# Altium PCB FEV-60_Motor_Driver.PcbDoc (part 1 of 2)
Units mil, origin at the board's own origin, x right, y up, seen from the top; angles counter-clockwise.
Board outline 4025 x 5275 mil, 2 copper layers (Top Layer, Bottom Layer); 167 components, 100 nets, 583 pads, 163 vias.
Unrouted connection lines stored in the file: 1.
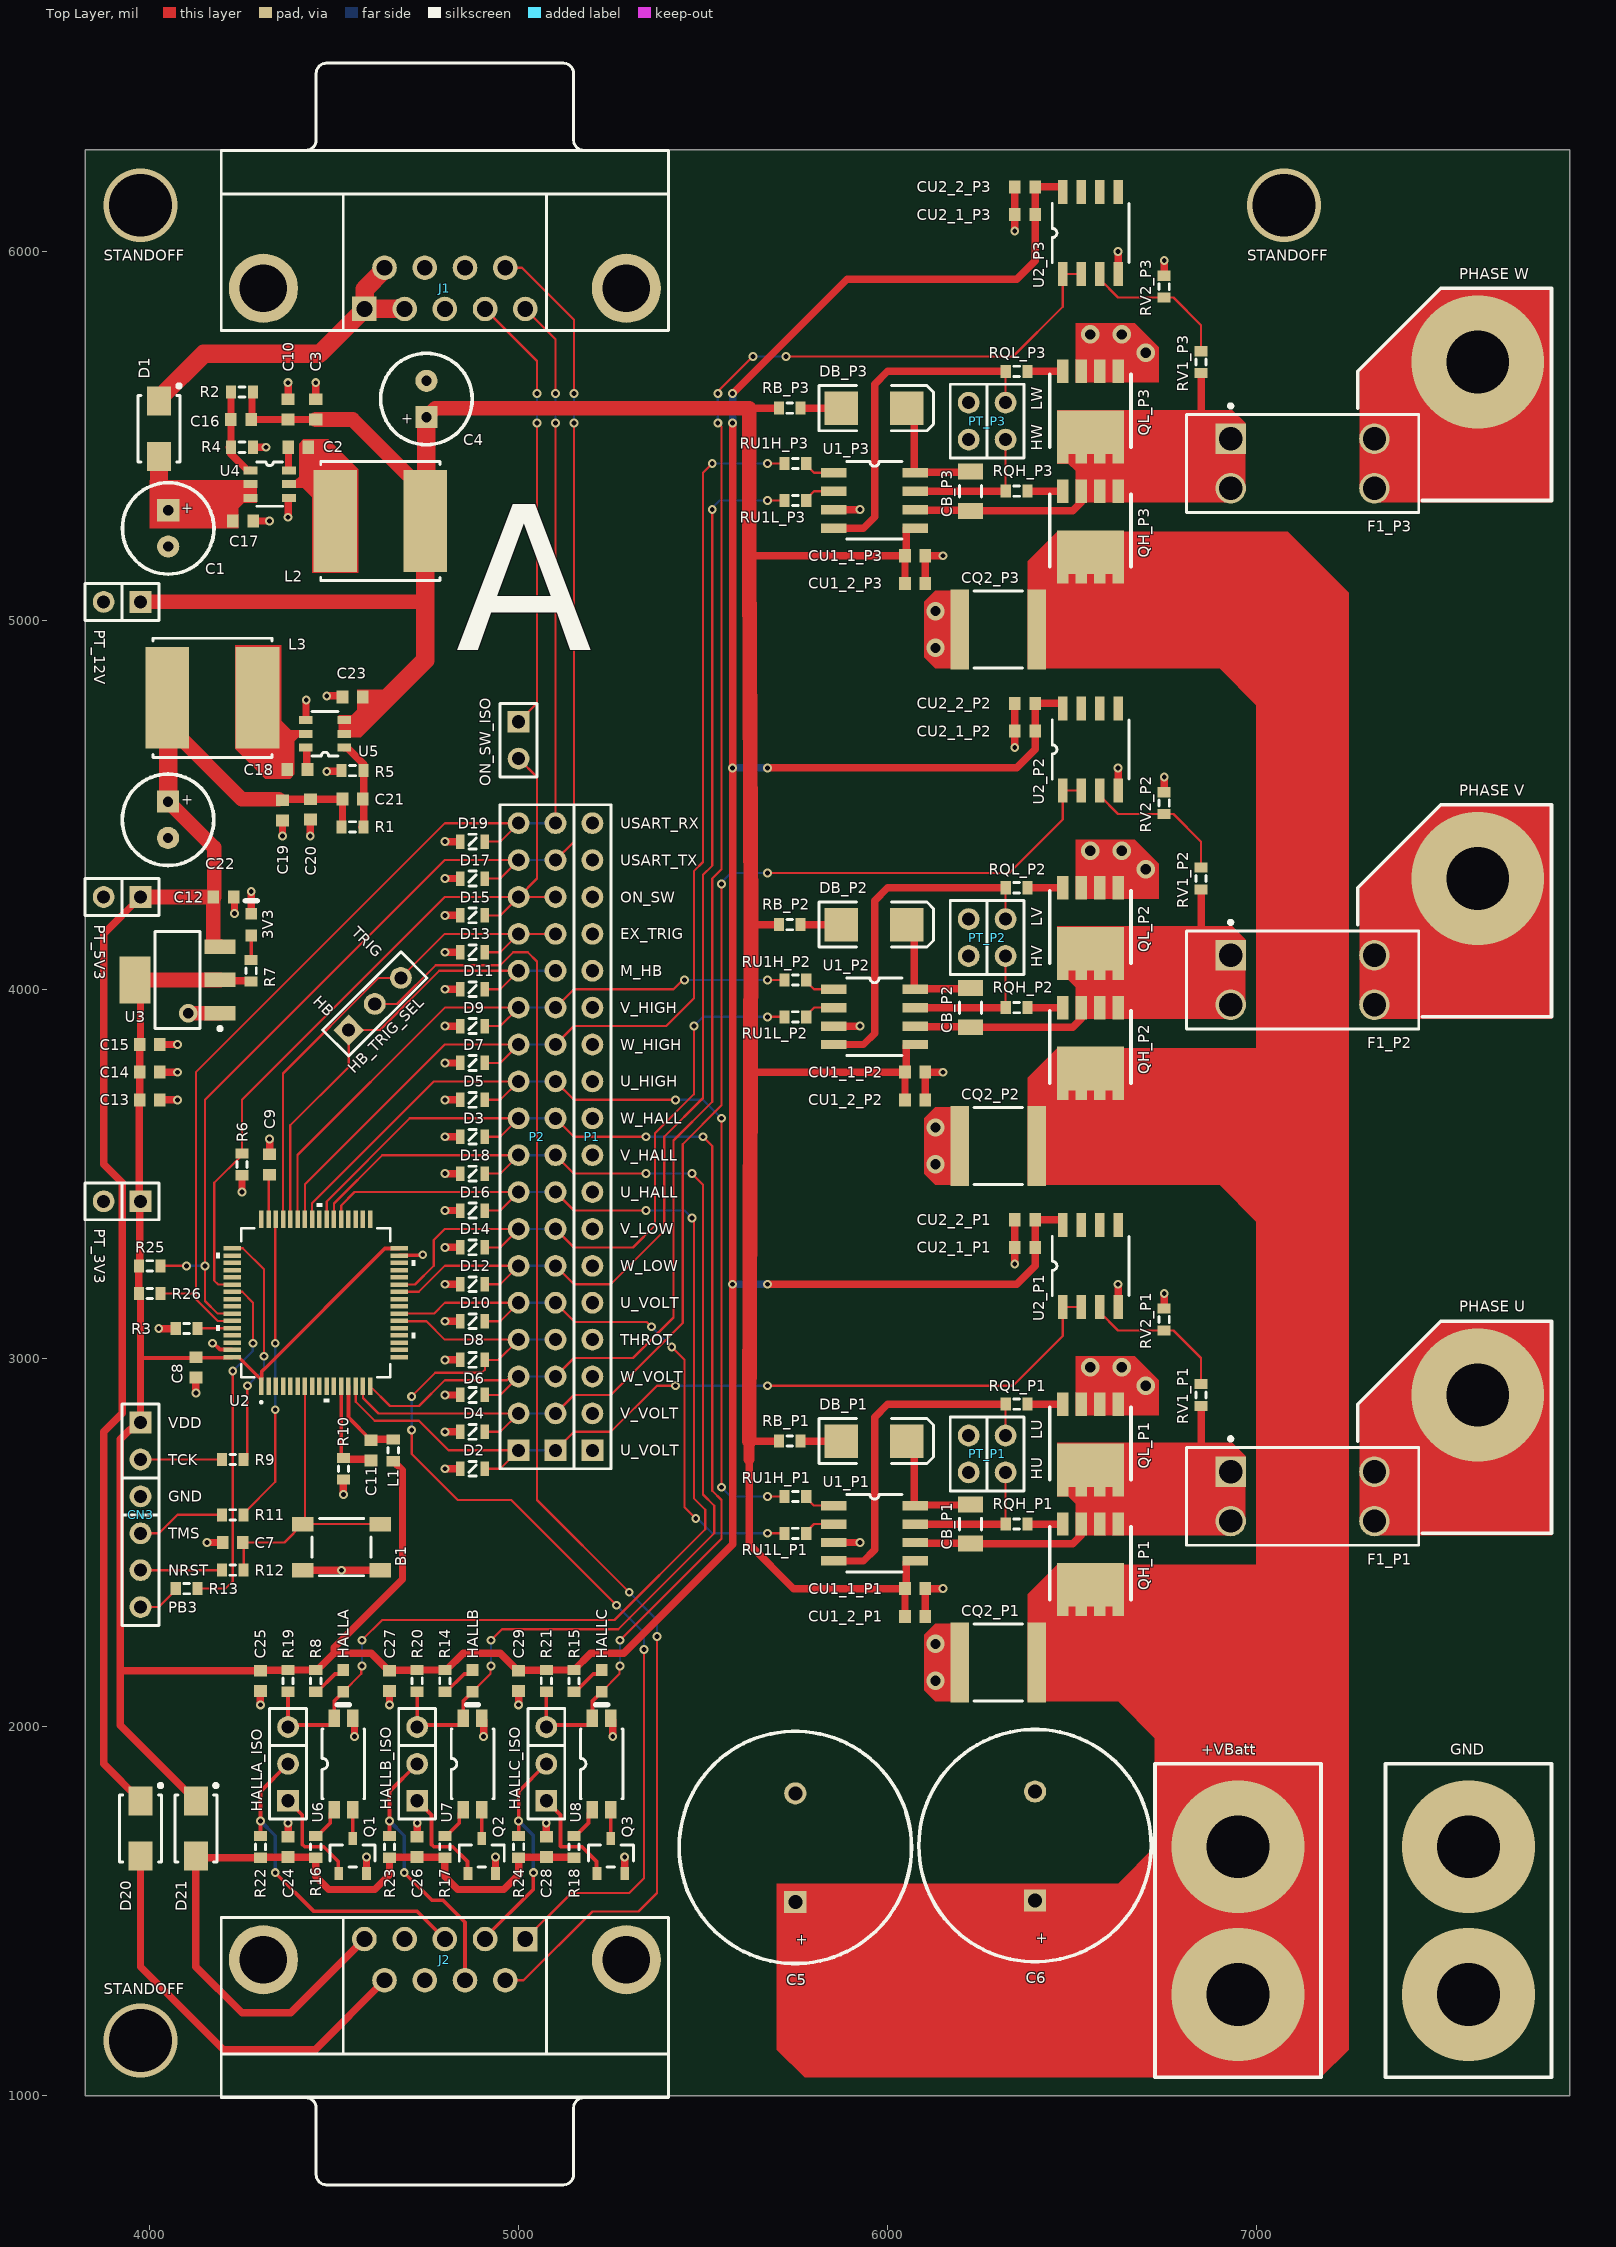
[diagram p0: Top Layer view]
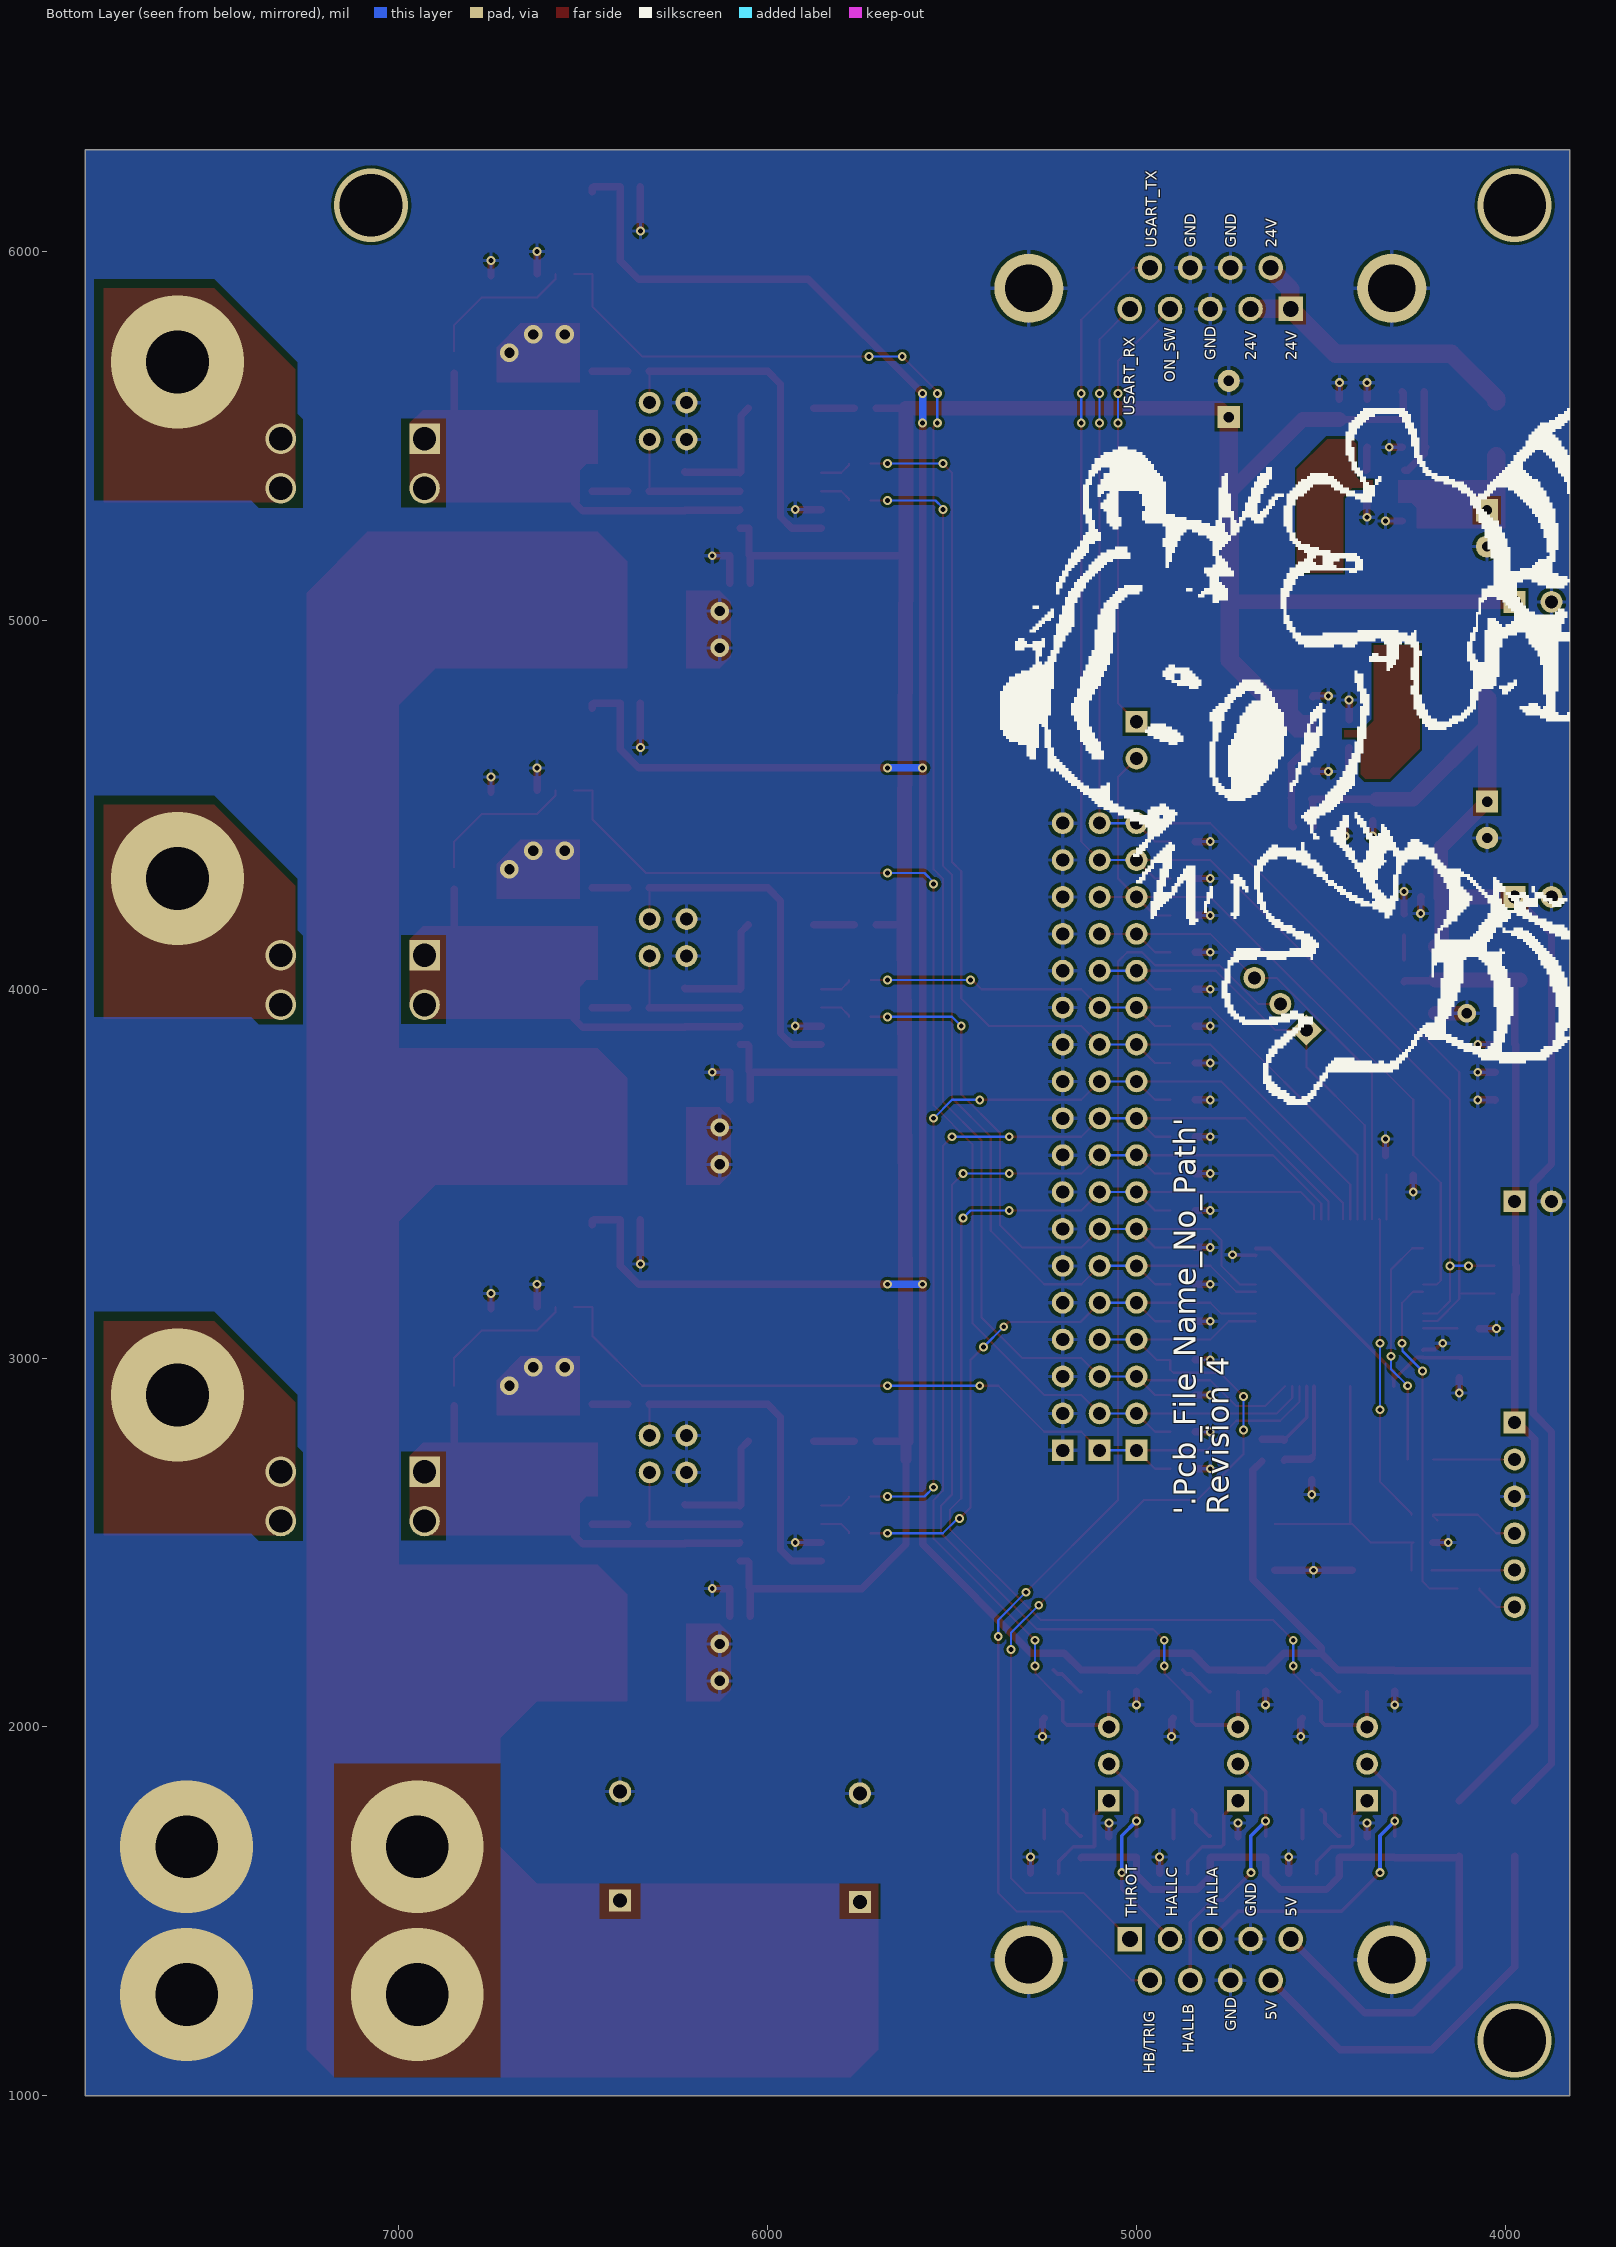
[diagram p1: Bottom Layer view, seen from below]

## Layer stack, top to bottom
Top Solder: solder mask 0.4, Solder Resist, Dk 3.5
Top Layer: signal copper 1.4
Dielectric 1: dielectric 12.6, FR-4, Dk 4.8
Bottom Layer: signal copper 1.4
Bottom Solder: solder mask 0.4, Solder Resist, Dk 3.5

## Board outline
3825,1000 7850,1000 7850,6275 3825,6275

## Design rules (kind name [scope] priority, off if disabled: settings)
Clearance Clearance_2 [All] p1: gap=8 ignorepadtopadclearanceinfootprint=FALSE
Clearance Clearance_1 [InNamedPolygon('Bottom Layer-GND')] p2: gap=10 ignorepadtopadclearanceinfootprint=FALSE except(0: Arc-Hole Track-Hole SMDPad-Hole THPad-Hole Via-Hole Fill-Hole Poly-Hole Region-Hole Text-Hole; 20: Via-Fill Via-Poly Via-Region)
Clearance [InNet('120V') vs InNet('GND')] p3: gap=6 ignorepadtopadclearanceinfootprint=FALSE except(200: Via-Poly)
ComponentClearance [All] p1: gap=6 collisioncheckmode=3 verticalgap=10 showdistances=FALSE
HoleSize [All] p1: absolutevalues=TRUE maxlimit=200 minlimit=1 maxpercent=80.000 minpercent=20.000
HoleToHoleClearance [All] p1: gap=6 allowstackedmicrovias=TRUE
MinimumSolderMaskSliver [All] p1: minsoldermaskwidth=6
PlaneClearance PlaneClearance_1 [All] p1: clearance=20
PolygonConnect PolygonConnect_3 [All vs IsNamedPolygon('Bottom Layer-GND')] p1: connectstyle=Relief reliefconductorwidth=10 reliefentries=4 polygonreliefangle="90 Angle" airgapwidth=10
PolygonConnect PolygonConnect_2 [All vs IsNamedPolygon('Bottom Layer-GND')] p2: connectstyle=Relief reliefconductorwidth=25 reliefentries=4 polygonreliefangle="90 Angle" airgapwidth=10
PolygonConnect [All] p3: connectstyle=Relief reliefconductorwidth=10 reliefentries=4 polygonreliefangle="90 Angle" airgapwidth=10
RoutingVias [All] p1: holewidth=13 width=24 viastyle="Through Hole" minholewidth=13 minwidth=24 maxholewidth=28 maxwidth=50
SilkToSilkClearance [All] p1: silktosilkclearance=3
SilkToSolderMaskClearance [IsPad] p1: minsilkscreentomaskgap=5 clearancetoexposedcopper=TRUE
SolderMaskExpansion [All] p1: expansion=4
Width [All] p1: maxlimit=100 minlimit=6 preferedwidth=6
23 further rules are at their usual default settings.

## Classes and differential pairs
net class HB_TRIG_SEL_Nets: EX_TRIG HB_TRIG M_HB
net class R26_Nets: 3V3 USART_RX
net class R25_Nets: 3V3 USART_TX
net class ON_SW_ISO_Nets: ON_SW ON_SWD
net class R6_Nets: GND ON_SW
net class PT_5V3_Nets: 5V3 GND
net class PT_12V_Nets: 12V GND
net class PT_3V3_Nets: 3V3 GND
net class C29_Nets: 3V3 GND
net class C28_Nets: 3V GND
net class C27_Nets: 3V3 GND
net class C26_Nets: 3V GND
net class C25_Nets: 3V3 GND
net class C24_Nets: 3V GND
net class U8_Nets: GND HALL3 NetQ3_3 NetR18_1
net class U7_Nets: GND HALL2 NetQ2_3 NetR17_1
net class HALLC_ISO_Nets: HALL3 HALLC ISOC
net class HALLB_ISO_Nets: HALL2 HALLB ISOB
net class HALLA_ISO_Nets: HALL1 HALLA ISOA
net class U6_Nets: GND HALL1 NetQ1_3 NetR16_1
net class U5_Nets: 12V FB2 GND NetC18_1 NetC18_2
net class RU1L_P3_Nets: LIN3 NetRU1L_P3_1
net class RU1L_P2_Nets: LIN2 NetRU1L_P2_1
net class RU1L_P1_Nets: LIN1 NetRU1L_P1_1
net class RU1H_P3_Nets: HIN3 NetRU1H_P3_1
net class RU1H_P2_Nets: HIN2 NetRU1H_P2_1
net class RU1H_P1_Nets: HIN1 NetRU1H_P1_1
net class R24_Nets: 3V HALLC
net class R23_Nets: 3V HALLB
net class R22_Nets: 3V HALLA
net class R21_Nets: 3V3 HALL3
net class R20_Nets: 3V3 HALL2
net class R19_Nets: 3V3 HALL1
net class R18_Nets: 3V NetR18_1
net class R17_Nets: 3V NetR17_1
net class R16_Nets: 3V NetR16_1
net class R15_Nets: 3V3 NetHALLC_1
net class R14_Nets: 3V3 NetHALLB_1
net class R8_Nets: 3V3 NetHALLA_1
net class R5_Nets: FB2 GND
net class R1_Nets: 5V3 FB2
net class Q3_Nets: GND ISOC NetQ3_3
net class Q2_Nets: GND ISOB NetQ2_3
net class Q1_Nets: GND ISOA NetQ1_3
net class L3_Nets: 5V3 NetC18_1
net class J2_Nets: 3V 5V GND HALLA HALLB HALLC HB_TRIG_SEL THROTTLE
net class HALLC_Nets: HALL3 NetHALLC_1
net class HALLB_Nets: HALL2 NetHALLB_1
net class HALLA_Nets: HALL1 NetHALLA_1
net class D21_Nets: 3V 3V3
net class D20_Nets: 5V 5V3
net class D19_Nets: GND USART_RX
net class D18_Nets: GND HALL2
net class D17_Nets: GND USART_TX
net class D16_Nets: GND HALL1
net class D15_Nets: GND ON_SW
net class D14_Nets: GND LIN2
net class D13_Nets: EX_TRIG GND
net class D12_Nets: GND LIN3
net class D11_Nets: GND M_HB
net class D10_Nets: GND LIN1
net class D9_Nets: GND HIN2
net class D8_Nets: GND THROTTLE
net class D7_Nets: GND HIN3
net class D6_Nets: GND V_SENSE3
net class D5_Nets: GND HIN1
net class D4_Nets: GND V_SENSE2
net class D3_Nets: GND HALL3
net class D2_Nets: GND V_SENSE1
net class C22_Nets: 5V3 GND
net class C21_Nets: 5V3 FB2
net class C20_Nets: 5V3 GND
net class C19_Nets: 5V3 GND
net class C18_Nets: NetC18_1 NetC18_2
net class C12_Nets: 5V3 GND
net class 3V3_Nets: GND Net3V3_1
net class PT_P3_Nets: GND HO_P3 LO_P3
net class PT_P2_Nets: GND HO_P2 LO_P2
net class PT_P1_Nets: GND HO_P1 LO_P1
net class R4_Nets: FB1 GND
net class R2_Nets: 12V FB1
net class L2_Nets: 12V NetC2_1
net class J1_Nets: 24V GND ON_SWD USART_RX USART_TX
net class C16_Nets: 12V FB1
net class C10_Nets: 12V GND
net class C2_Nets: NetC2_1 NetC2_2
net class P1_Nets: GND
net class U2_Nets: 3V3 A3V3 AGND BOOT0 EX_TRIG GND HALL1 HALL2 HALL3 HIN1 HIN2 HIN3 LIN1 LIN2 LIN3 M_HB NRST ON_SW PB3 PF6 TCK THROTTLE TMS USART_RX USART_TX V_SENSE1 V_SENSE2 V_SENSE3
net class D1_Nets: 24V NetC1_1
net class C4_Nets: 12V GND
net class C3_Nets: 12V GND
net class C17_Nets: GND NetC1_1
net class C1_Nets: GND NetC1_1
net class U4_Nets: FB1 GND NetC1_1 NetC2_1 NetC2_2
net class RV2_P3_Nets: GND NetRV1_P3_1
net class RV2_P2_Nets: GND NetRV1_P2_1
net class RV2_P1_Nets: GND NetRV1_P1_1
net class RV1_P3_Nets: NetCB_P3_1 NetRV1_P3_1
net class RV1_P2_Nets: NetCB_P2_1 NetRV1_P2_1
net class RV1_P1_Nets: NetCB_P1_1 NetRV1_P1_1
net class RQL_P3_Nets: LO_P3 NetQL_P3_2
net class RQL_P2_Nets: LO_P2 NetQL_P2_2
net class RQL_P1_Nets: LO_P1 NetQL_P1_2
net class RQH_P3_Nets: HO_P3 NetQH_P3_2
net class RQH_P2_Nets: HO_P2 NetQH_P2_2
net class RQH_P1_Nets: HO_P1 NetQH_P1_2
net class RB_P3_Nets: 12V NetDB_P3_1
net class RB_P2_Nets: 12V NetDB_P2_1
net class RB_P1_Nets: 12V NetDB_P1_1
net class QL_P3_Nets: GND NetQH_P3_3 NetQL_P3_2
net class QL_P2_Nets: GND NetQH_P2_3 NetQL_P2_2
net class QL_P1_Nets: GND NetQH_P1_3 NetQL_P1_2
net class QH_P3_Nets: 120V NetQH_P3_2 NetQH_P3_3
net class QH_P2_Nets: 120V NetQH_P2_2 NetQH_P2_3
net class QH_P1_Nets: 120V NetQH_P1_2 NetQH_P1_3
net class DB_P3_Nets: NetCB_P3_2 NetDB_P3_1
net class DB_P2_Nets: NetCB_P2_2 NetDB_P2_1
net class DB_P1_Nets: NetCB_P1_2 NetDB_P1_1
net class CU2_2_P3_Nets: 3V3 GND
net class CU2_1_P3_Nets: 3V3 GND
net class CU2_1_P2_Nets: 3V3 GND
net class CU2_1_P1_Nets: 3V3 GND
net class CU1_2_P3_Nets: 12V GND
net class CU1_2_P2_Nets: 12V GND
net class CU1_2_P1_Nets: 12V GND
net class CU1_1_P2_Nets: 12V GND
net class CU1_1_P1_Nets: 12V GND
net class CQ2_P3_Nets: 120V GND
net class CQ2_P2_Nets: 120V GND
net class C5_Nets: 120V GND
net class C6_Nets: 120V GND
net class CB_P3_Nets: NetCB_P3_1 NetCB_P3_2
net class CB_P2_Nets: NetCB_P2_1 NetCB_P2_2
net class CB_P1_Nets: NetCB_P1_1 NetCB_P1_2
net class V_SENSE[3..1]: V_SENSE1 V_SENSE2 V_SENSE3
net class U3_Nets: 3V3 5V3 GND
net class U2_P3_Nets: 3V3 GND NetRV1_P3_1 V_SENSE3
net class U2_P2_Nets: 3V3 GND NetRV1_P2_1 V_SENSE2
net class U2_P1_Nets: 3V3 GND NetRV1_P1_1 V_SENSE1
net class R13_Nets: NetCN3_6 PB3
net class R12_Nets: NetCN3_5 NRST
net class R11_Nets: NetCN3_4 TMS
net class R10_Nets: AGND GND
net class R9_Nets: NetCN3_2 TCK
net class R7_Nets: 3V3 Net3V3_1
net class R3_Nets: BOOT0 GND
net class L1_Nets: 3V3 A3V3
net class F1_P3_Nets: NetCB_P3_1 NetF1_P3_3
net class F1_P2_Nets: NetCB_P2_1 NetF1_P2_3
net class F1_P1_Nets: NetCB_P1_1 NetF1_P1_3
net class CN3_Nets: 3V3 GND NetCN3_2 NetCN3_4 NetCN3_5 NetCN3_6
net class C15_Nets: 3V3 GND
net class C14_Nets: 3V3 GND
net class C13_Nets: 3V3 GND
net class C23_Nets: 12V GND
net class C11_Nets: A3V3 AGND
net class C9_Nets: GND PF6
net class C8_Nets: 3V3 GND
net class C7_Nets: GND NRST
net class CU2_2_P2_Nets: 3V3 GND
net class CU2_2_P1_Nets: 3V3 GND
net class B1_Nets: GND NRST
component class U_FEV-60_Motor_Driver_Mcu: 3V3 B1 C1 C2 C3 C4 C5 C6 C7 C8 C9 C10 C11 C12 C13 C14 C15 C16 C17 C18 C19 C20 C21 C22 C23 C24 C25 C26 C27 C28 C29 CN3 D1 D2 D3 D4 D5 D6 D7 D8 D9 D10 D11 D12 D13 D14 D15 D16 D17 D18 D19 D20 D21 HALLA HALLA_ISO HALLB HALLB_ISO HALLC HALLC_ISO HB_TRIG_SEL J1 J2 L1 L2 L3 ON_SW_ISO P1 P2 PT_3V3 PT_5V3 PT_12V Q1 Q2 Q3 R1 R2 R3 R4 R5 R6 R7 R8 R9 R10 R11 R12 R13 R14 R15 R16 R17 R18 R19 R20 R21 R22 R23 R24 R25 R26 U2 U3 U4 U5 U6 U7 U8
net class LIN[3..1]: LIN1 LIN2 LIN3
net class HIN[3..1]: HIN1 HIN2 HIN3
net class P2_Nets: EX_TRIG HALL1 HALL2 HALL3 HIN1 HIN2 HIN3 LIN1 LIN2 LIN3 M_HB NetCN2_1 NetCN2_2 NetCN2_6 NetCN2_7 NetCN2_8 NetCN2_9 NetCN2_10 NetCN2_12 NetCN2_14 NetCN2_15 NetCN2_17 NetCN2_18 NetCN2_22 NetCN2_24 NetCN2_25 NetCN2_26 NetCN2_27 NetCN2_29 NetCN2_31 NetCN2_32 NetCN2_34 NetCN2_36 NetCN2_38 ON_SW THROTTLE USART_RX USART_TX V_SENSE1 V_SENSE2 V_SENSE3
net class U1_P3_Nets: 12V GND HO_P3 LO_P3 NetCB_P3_1 NetCB_P3_2 NetRU1H_P3_1 NetRU1L_P3_1
net class U1_P2_Nets: 12V GND HO_P2 LO_P2 NetCB_P2_1 NetCB_P2_2 NetRU1H_P2_1 NetRU1L_P2_1
net class U1_P1_Nets: 12V GND HO_P1 LO_P1 NetCB_P1_1 NetCB_P1_2 NetRU1H_P1_1 NetRU1L_P1_1
net class CQ2_P1_Nets: 120V GND
net class CU1_1_P3_Nets: 12V GND
component class P3: CB_P3 CQ2_P3 CU1_1_P3 CU1_2_P3 CU2_1_P3 CU2_2_P3 DB_P3 F1_P3 PT_P3 QH_P3 QL_P3 RB_P3 RQH_P3 RQL_P3 RU1H_P3 RU1L_P3 RV1_P3 RV2_P3 U1_P3 U2_P3
component class P2: CB_P2 CQ2_P2 CU1_1_P2 CU1_2_P2 CU2_1_P2 CU2_2_P2 DB_P2 F1_P2 PT_P2 QH_P2 QL_P2 RB_P2 RQH_P2 RQL_P2 RU1H_P2 RU1L_P2 RV1_P2 RV2_P2 U1_P2 U2_P2
component class P1: CB_P1 CQ2_P1 CU1_1_P1 CU1_2_P1 CU2_1_P1 CU2_2_P1 DB_P1 F1_P1 PT_P1 QH_P1 QL_P1 RB_P1 RQH_P1 RQL_P1 RU1H_P1 RU1L_P1 RV1_P1 RV2_P1 U1_P1 U2_P1
channel class FEV-60_Motor_Driver_Phase1: PHASE1 PHASE2 PHASE3

## Components (designator, comment, footprint, x,y, rotation, side; value= is the part's Value field where it differs from the comment)
3V3 "LED-RED-AK-2" AVAG-HSMX-C190_V 4275,4175 r90 top
B1 "Button" "Button - duplicate" 4625,2425 r180 top
C1 "UVY1V101MED1TD" UVY1V101MED1TD 4050,5280 r270 top value=100uF
C2 "Cap Semi" 1608[0603] 4402.56,5469.21 r180 top value=100nF
C3 "Cap Semi" 1608[0603] 4450,5571.77 r270 top value=10uF
C4 "UVY1V101MED1TD" UVY1V101MED1TD 4750,5569.21 r90 top value=100uF
C5 "UCS2D151MHD1TN" UCS2D151MHD1TN 5920,1675 r90 top value=100pF
C6 "UCS2D151MHD1TN" UCS2D151MHD1TN 6570,1680 r90 top value=100pF
C7 "Cap Semi" 1608[0603] 4225,2500 r0 top value=100nF
C8 "Cap Semi" 1608[0603] 4125,2975 r90 top value=22uF
C9 "Cap Semi" 1608[0603] 4325,3525 r270 top value=2.2uF
C10 "Cap Semi" 1608[0603] 4375,5571.77 r270 top value=10uF
C11 "Cap Semi" 1608[0603] 4600,2750 r90 top value=10uF
C12 "Cap Semi" 1608[0603] 4200,4250 r180 top value=10uF
C13 "Cap Semi" 1608[0603] 4000,3700 r180 top value=10uF
C14 "Cap Semi" 1608[0603] 4000,3775 r180 top value=10uF
C15 "Cap Semi" 1608[0603] 4000,3850 r180 top value=10uF
C16 "Cap Semi" 1608[0603] 4247.44,5544.21 r0 top value=12pF
C17 "Cap Semi" 1608[0603] 4252.56,5269.21 r180 top value=10uF
C18 "Cap Semi" 1608[0603] 4400,4595 r0 top value=100nF
C19 "Cap Semi" 1608[0603] 4360,4485 r90 top value=10uF
C20 "Cap Semi" 1608[0603] 4436.02,4487.44 r90 top value=10uF
C21 "Cap Semi" 1608[0603] 4550,4515 r180 top value=47pF
C22 "UVY1V101MED1TD" UVY1V101MED1TD 4049.61,4490 r270 top value=100uF
C23 "Cap Semi" 1608[0603] 4550,4792.32 r0 top value=10uF
C24 "Cap Semi" 1608[0603] 4375,1675 r270 top value=10uF
C25 "Cap Semi" 1608[0603] 4300,2125 r90 top value=10uF
C26 "Cap Semi" 1608[0603] 4725,1675 r270 top value=10uF
C27 "Cap Semi" 1608[0603] 4650,2125 r90 top value=10uF
C28 "Cap Semi" 1608[0603] 5075,1675 r270 top value=10uF
C29 "Cap Semi" 1608[0603] 5000,2125 r90 top value=10uF
CB_P1 "Cap Semi" C1206 6225,2550 r90 top value=10uF (schematic designator CB)
CB_P2 "Cap Semi" C1206 6225,3950 r90 top value=10uF (schematic designator CB)
CB_P3 "Cap Semi" C1206 6225,5350 r90 top value=10uF (schematic designator CB)
CN3 "Header 6X1" HDR1X6 3975,2825 r270 top
CQ2_P1 "1uF" TDK-C5750-2_M 6300,2175 r180 top (schematic designator CQ2)
CQ2_P2 "1uF" TDK-C5750-2_M 6300,3575 r180 top (schematic designator CQ2)
CQ2_P3 "1uF" TDK-C5750-2_M 6300,4975 r180 top (schematic designator CQ2)
CU1_1_P1 "Cap Semi" 1608[0603] 6075,2375 r0 top value=10uF (schematic designator CU1_1)
CU1_1_P2 "Cap Semi" 1608[0603] 6075,3775 r0 top value=10uF (schematic designator CU1_1)
CU1_1_P3 "Cap Semi" 1608[0603] 6075,5175 r0 top value=10uF (schematic designator CU1_1)
CU1_2_P1 "Cap Semi" 1608[0603] 6075,2300 r0 top value=10uF (schematic designator CU1_2)
CU1_2_P2 "Cap Semi" 1608[0603] 6075,3700 r0 top value=10uF (schematic designator CU1_2)
CU1_2_P3 "Cap Semi" 1608[0603] 6075,5100 r0 top value=10uF (schematic designator CU1_2)
CU2_1_P1 "Cap Semi" 1608[0603] 6372.44,3300 r180 top value=10uF (schematic designator CU2_1)
CU2_1_P2 "Cap Semi" 1608[0603] 6372.44,4700 r180 top value=10uF (schematic designator CU2_1)
CU2_1_P3 "Cap Semi" 1608[0603] 6372.44,6100 r180 top value=10uF (schematic designator CU2_1)
CU2_2_P1 "Cap Semi" 1608[0603] 6372.44,3375 r180 top value=10uF (schematic designator CU2_2)
CU2_2_P2 "Cap Semi" 1608[0603] 6372.44,4775 r180 top value=10uF (schematic designator CU2_2)
CU2_2_P3 "Cap Semi" 1608[0603] 6372.44,6175 r180 top value=10uF (schematic designator CU2_2)
D1 "STPS2L30A" STPS2L30A 4025,5519.21 r270 top
D2 "SP1103C-01UTG" SP1103C-01UTG 4875,2700 r180 top
D3 "SP1103C-01UTG" SP1103C-01UTG 4875,3600 r180 top
D4 "SP1103C-01UTG" SP1103C-01UTG 4875,2800 r180 top
D5 "SP1103C-01UTG" SP1103C-01UTG 4875,3700 r180 top
D6 "SP1103C-01UTG" SP1103C-01UTG 4875,2900 r180 top
D7 "SP1103C-01UTG" SP1103C-01UTG 4875,3800 r180 top
D8 "SP1103C-01UTG" SP1103C-01UTG 4875,2995 r180 top
D9 "SP1103C-01UTG" SP1103C-01UTG 4875,3900 r180 top
D10 "SP1103C-01UTG" SP1103C-01UTG 4875,3100 r180 top
D11 "SP1103C-01UTG" SP1103C-01UTG 4875,4000 r180 top
D12 "SP1103C-01UTG" SP1103C-01UTG 4875,3200 r180 top
D13 "SP1103C-01UTG" SP1103C-01UTG 4875,4100 r180 top
D14 "SP1103C-01UTG" SP1103C-01UTG 4875,3300 r180 top
D15 "SP1103C-01UTG" SP1103C-01UTG 4875,4200 r180 top
D16 "SP1103C-01UTG" SP1103C-01UTG 4875,3400 r180 top
D17 "SP1103C-01UTG" SP1103C-01UTG 4875,4300 r180 top
D18 "SP1103C-01UTG" SP1103C-01UTG 4875,3500 r180 top
D19 "SP1103C-01UTG" SP1103C-01UTG 4875,4400 r180 top
D20 "STPS2L30A" STPS2L30A 3975,1725 r270 top
D21 "STPS2L30A" STPS2L30A 4125,1725 r270 top
DB_P1 "STPS2200U" SMB 5963.58,2775 r0 top (schematic designator DB)
DB_P2 "STPS2200U" SMB 5963.58,4175 r0 top (schematic designator DB)
DB_P3 "STPS2200U" SMB 5963.58,5575 r0 top (schematic designator DB)
F1_P1 "3568" KSTN-3568_V 7125,2625 r0 top (schematic designator F1)
F1_P2 "3568" KSTN-3568_V 7125,4025 r0 top (schematic designator F1)
F1_P3 "3568" KSTN-3568_V 7125,5425 r0 top (schematic designator F1)
HALLA "LED-RED-AK-2" AVAG-HSMX-C190_V 4525,2125 r270 top
HALLA_ISO "Header 3" HDR1X3 4375,1800 r90 top
HALLB "LED-RED-AK-2" AVAG-HSMX-C190_V 4875,2125 r270 top
HALLB_ISO "Header 3" HDR1X3 4725,1800 r90 top
HALLC "LED-RED-AK-2" AVAG-HSMX-C190_V 5225,2125 r270 top
HALLC_ISO "Header 3" HDR1X3 5075,1800 r90 top
HB_TRIG_SEL "Header 3" HDR1X3 4539.29,3889.29 r45 top
J1 "D Connector 9" DSUB1.385-2H9 4800,6274.02 r0 top locked
J2 "D Connector 9" DSUB1.385-2H9 4800,995.08 r180 top locked
L1 "Ferrite" J1-0603 4660,2750 r90 top
L2 "Inductor" 74404084100 4625,5269.21 r0 top value=10uH
L3 "Inductor" 74404084100 4170,4790 r180 top value=10uH
ON_SW_ISO "Header 2" HDR1X2 5000,4725 r270 top
P1 "Header 18" HDR1X18 5200,2750 r90 top locked
P2 "Header 18X2" HDR2X18 5100,2750 r90 top locked
PT_3V3 "Header 2" HDR1X2 3975,3425 r180 top
PT_5V3 "Header 2" HDR1X2 3975,4250 r180 top
PT_12V "Header 2" HDR1X2 3975,5050 r180 top
PT_P1 "Header 2X2" HDR2X2 6220,2790 r270 top (schematic designator PT)
PT_P2 "Header 2X2" HDR2X2 6220,4190 r270 top (schematic designator PT)
PT_P3 "Header 2X2" HDR2X2 6220,5590 r270 top (schematic designator PT)
Q1 "RK7002BMT116" SOT95P240X120-3N 4550,1650 r90 top
Q2 "RK7002BMT116" SOT95P240X120-3N 4900,1650 r90 top
Q3 "RK7002BMT116" SOT95P240X120-3N 5250,1650 r90 top
QH_P1 "TPH2900ENH" TPH2900ENH 6625,2555 r270 top (schematic designator QH)
QH_P2 "TPH2900ENH" TPH2900ENH 6625,3955 r270 top (schematic designator QH)
QH_P3 "TPH2900ENH" TPH2900ENH 6625,5355 r270 top (schematic designator QH)
QL_P1 "TPH2900ENH" TPH2900ENH 6625,2880 r270 top (schematic designator QL)
QL_P2 "TPH2900ENH" TPH2900ENH 6625,4280 r270 top (schematic designator QL)
QL_P3 "TPH2900ENH" TPH2900ENH 6625,5680 r270 top (schematic designator QL)
R1 "Res3" J1-0603 4549.61,4440 r0 top value=172K
R2 "Res3" J1-0603 4250,5619.21 r180 top value=422K
R3 "Res3" J1-0603 4100,3080 r0 top value=10K
R4 "Res3" J1-0603 4250,5469.21 r0 top value=30.1K
R5 "Res3" J1-0603 4549.61,4592.32 r180 top value=30.1K
R6 "Res3" J1-0603 4250,3525 r270 top value=10K
R7 "Res3" J1-0603 4275,4050 r270 top value=1K
R8 "Res3" J1-0603 4450,2125 r90 top value=1K
R9 "Res3" J1-0603 4225,2725 r0 top value=22
R10 "Res3" J1-0603 4525,2700 r90 top value=0
R11 "Res3" J1-0603 4225,2575 r0 top value=22
R12 "Res3" J1-0603 4225,2425 r0 top value=22
R13 "Res3" J1-0603 4100,2375 r0 top value=22
R14 "Res3" J1-0603 4800,2125 r90 top value=1K
R15 "Res3" J1-0603 5150,2125 r90 top value=1K
R16 "Res3" J1-0603 4450,1675 r270 top value=calc
R17 "Res3" J1-0603 4800,1675 r270 top value=calc
R18 "Res3" J1-0603 5150,1675 r270 top value=calc
R19 "Res3" J1-0603 4375,2125 r90 top value=10K
R20 "Res3" J1-0603 4725,2125 r90 top value=10K
R21 "Res3" J1-0603 5075,2125 r90 top value=10K
R22 "Res3" J1-0603 4300,1675 r270 top value=10K
R23 "Res3" J1-0603 4650,1675 r270 top value=10K
R24 "Res3" J1-0603 5000,1675 r270 top value=10K
R25 "Res3" J1-0603 4000,3250 r180 top value=10K
R26 "Res3" J1-0603 4000,3175 r180 top value=10K
RB_P1 "Res3" J1-0603 5735,2775 r0 top value=5 (schematic designator RB)
RB_P2 "Res3" J1-0603 5735,4175 r0 top value=5 (schematic designator RB)
RB_P3 "Res3" J1-0603 5735,5575 r0 top value=5 (schematic designator RB)
RQH_P1 "Res3" J1-0603 6350,2550 r0 top value=5 (schematic designator RQH)
RQH_P2 "Res3" J1-0603 6350,3950 r0 top value=5 (schematic designator RQH)
RQH_P3 "Res3" J1-0603 6350,5350 r0 top value=5 (schematic designator RQH)
RQL_P1 "Res3" J1-0603 6350,2875 r0 top value=5 (schematic designator RQL)
RQL_P2 "Res3" J1-0603 6350,4275 r0 top value=5 (schematic designator RQL)
RQL_P3 "Res3" J1-0603 6350,5675 r0 top value=5 (schematic designator RQL)
RU1H_P1 "Res3" J1-0603 5750,2625 r180 top value=1K (schematic designator RU1H)
RU1H_P2 "Res3" J1-0603 5750,4025 r180 top value=1K (schematic designator RU1H)
RU1H_P3 "Res3" J1-0603 5750,5425 r180 top value=1K (schematic designator RU1H)
RU1L_P1 "Res3" J1-0603 5750,2525 r180 top value=1K (schematic designator RU1L)
RU1L_P2 "Res3" J1-0603 5750,3925 r180 top value=1K (schematic designator RU1L)
RU1L_P3 "Res3" J1-0603 5750,5325 r180 top value=1K (schematic designator RU1L)
RV1_P1 "Res3" J1-0603 6850,2900 r270 top value=1Meg (schematic designator RV1)
RV1_P2 "Res3" J1-0603 6850,4300 r270 top value=1Meg (schematic designator RV1)
RV1_P3 "Res3" J1-0603 6850,5700 r270 top value=1Meg (schematic designator RV1)
RV2_P1 "Res3" J1-0603 6750,3104.53 r270 top value=22K (schematic designator RV2)
RV2_P2 "Res3" J1-0603 6750,4504.53 r270 top value=22K (schematic designator RV2)
RV2_P3 "Res3" J1-0603 6750,5904.53 r270 top value=22K (schematic designator RV2)
U1_P1 "FAN7191-F085" FAN7191-F085 5854.53,2600 r0 top (schematic designator U1)
U1_P2 "FAN7191-F085" FAN7191-F085 5854.53,4000 r0 top (schematic designator U1)
U1_P3 "FAN7191-F085" FAN7191-F085 5854.53,5400 r0 top (schematic designator U1)
U2 "MCU_LQFP64" "STM32F030R8 - duplicate" 4450,3150 r90 top locked
U2_P1 "TLV272IDR" D0008A_M 6550,3250 r90 top (schematic designator U2)
U2_P2 "TLV272IDR" D0008A_M 6550,4650 r90 top (schematic designator U2)
U2_P3 "TLV272IDR" D0008A_M 6550,6050 r90 top (schematic designator U2)
U3 "LD1117S33TR" "LD1117S33TR - duplicate" 4075,4025 r180 top
U4 "AP63301WU-7" AP63301WU-7 4325,5369.21 r0 top
U5 "AP63301WU-7" AP63301WU-7 4475,4692.32 r180 top
U6 "TLP291(BLL-TP,SE" "Toshiba_11-11F1_0 - duplicate" 4525,1900 r0 top
U7 "TLP291(BLL-TP,SE" "Toshiba_11-11F1_0 - duplicate" 4875,1900 r0 top
U8 "TLP291(BLL-TP,SE" "Toshiba_11-11F1_0 - duplicate" 5225,1900 r0 top

## Footprints (in the part's own frame and the unit in brackets; to place one, negate y for a bottom-side part, rotate by r counter-clockwise, add the part's x,y. Pads: shape width x height; smd on the part's side, far side on the other; paste and mask are expansions set on the pad)
1608[0603] [mm] "Chip Capacitor, Body 1.6x0.8mm, IPC High Density"
  rect 0.8x0.9 smd: 1(-0.7,0) 2(0.7,0)
  body extent -0.87,-0.48 0.87,0.48, height 1.3
74404084100 [mm] "10µH Shielded Wirewound Inductor 3.3A 29mOhm Nonstandard"
  rect 3x7 smd: 1(-3.1,0) 2(3.1,0)
  silkscreen extent -4.1,-4.1 4.1,4.1, body extent -4.1,-4.1 4.1,4.1, height 4.2
AP63301WU-7 [mm] "Buck Switching Regulator IC Positive Adjustable 0.8V 1 Output 3A SOT-23-6 Thin, TSOT-23-6"
  rect 0.95x0.55 smd: 1(-1.325,0.95) 2(-1.325,0) 3(-1.325,-0.95) 4(1.325,-0.95) 5(1.325,0) 6(1.325,0.95)
  silkscreen extent -0.89,-1.52 0.89,1.52, body extent -1.4,-1.5 1.4,1.5, height 1.1
AVAG-HSMX-C190_V [mm]
  rect 0.8x0.8 smd: 1(-0.75,0) 2(0.75,0)
  silkscreen extent 1.65,-0.4 1.65,0.4, body extent -0.8,-0.4 0.8,0.4, height 0.9
"Button - duplicate" [mm]
  rect 1.5x1 smd: 1(0,0) 2(0,-3.175) 3(5.334,-3.175) 4(5.334,0)
  silkscreen extent 0.64,-3.56 4.7,0.38
C1206 [mm] "Chip Capacitor, Body 3.2x1.6mm, IPC High Density"
  rect 1.1x1.7 smd: 1(-1.35,0) 2(1.35,0)
  silkscreen extent -0.4,-0.75 0.4,0.75, body extent -1.7,-0.9 1.7,0.9, height 1.3
D0008A_M [mm] "SOIC, 8-Leads, Body 5x4mm, Pitch 1.27mm, IPC Low Density"
  rect 1.65x0.65 smd: 1(-2.825,1.905) 2(-2.825,0.635) 3(-2.825,-0.635) 4(-2.825,-1.905) 5(2.825,-1.905) 6(2.825,-0.635) 7(2.825,0.635) 8(2.825,1.905)
  silkscreen extent -2.03,-2.67 2.03,2.63, body extent -3,-2.45 3,2.45, height 1.63
DSUB1.385-2H9 [mm] "Connector; D Subminiature; 9 Position; Right Angle; Pitch 1.385 mm"
  rect 1.69x1.69 hole 1.09: 1(-5.54,-10.92)
  round 1.69 hole 1.09: 2(-2.77,-10.92) 3(0,-10.92) 4(2.77,-10.92) 5(5.54,-10.92) 6(-4.155,-8.08) 7(-1.385,-8.08) 8(1.385,-8.08) 9(4.155,-8.08)
  round 4.76 hole 3.26: 10(-12.495,-9.5) 11(12.495,-9.5)
  silkscreen extent -15.4,-12.4 15.4,6
FAN7191-F085 [mm]
  rect 1.75x0.65 smd: 1(0,0) 2(0,-1.27) 3(0,-2.54) 4(0,-3.81) 5(5.6,-3.81) 6(5.6,-2.54) 7(5.6,-1.27) 8(5.6,0)
  silkscreen extent 0.89,-4.57 4.7,0.76
HDR1X2 [mm] "Connector; Header; 2 Position"
  rect 1.5x1.5 hole 0.9: 1(0,0)
  round 1.5 hole 0.9: 2(2.54,0)
  silkscreen extent -1.27,-1.27 3.81,1.27
HDR1X3 [mm] "Connector; Header; 3 Position"
  rect 1.5x1.5 hole 0.9: 1(0,0)
  round 1.5 hole 0.9: 2(2.54,0) 3(5.08,0)
  silkscreen extent -1.27,-1.27 6.35,1.27
HDR1X6 [mm] "Connector; Header; 6 Position"
  rect 1.5x1.5 hole 0.9: 1(0,0)
  round 1.5 hole 0.9: 2(2.54,0) 3(5.08,0) 4(7.62,0) 5(10.16,0) 6(12.7,0)
  silkscreen extent -1.27,-1.27 13.97,1.27
HDR1X18 [mm] "Connector; Header; 18 Position"
  rect 1.5x1.5 hole 0.9: 1(0,0)
  round 1.5 hole 0.9: 2(2.54,0) 3(5.08,0) 4(7.62,0) 5(10.16,0) 6(12.7,0) 7(15.24,0) 8(17.78,0) 9(20.32,0) 10(22.86,0) 11(25.4,0) 12(27.94,0) 13(30.48,0) 14(33.02,0) 15(35.56,0) 16(38.1,0) 17(40.64,0) 18(43.18,0)
  silkscreen extent -1.27,-1.27 44.45,1.27
HDR2X2 [mm] "Connector; Header; 2x2 Position"
  round 1.5 hole 0.9: 1(0,0) 2(0,2.54) 3(2.54,0) 4(2.54,2.54)
  silkscreen extent -1.27,-1.27 3.81,3.81
HDR2X18 [mm] "Connector; Header; 18x2 Position"
  rect 1.5x1.5 hole 0.9: 1(0,0) 2(0,2.54)
  round 1.5 hole 0.9: 3(2.54,0) 4(2.54,2.54) 5(5.08,0) 6(5.08,2.54) 7(7.62,0) 8(7.62,2.54) 9(10.16,0) 10(10.16,2.54) 11(12.7,0) 12(12.7,2.54) 13(15.24,0) 14(15.24,2.54) 15(17.78,0) 16(17.78,2.54) 17(20.32,0) 18(20.32,2.54) 19(22.86,0) 20(22.86,2.54) 21(25.4,0) 22(25.4,2.54) 23(27.94,0) 24(27.94,2.54) 25(30.48,0) 26(30.48,2.54) 27(33.02,0) 28(33.02,2.54) 29(35.56,0) 30(35.56,2.54) 31(38.1,0) 32(38.1,2.54) 33(40.64,0) 34(40.64,2.54) 35(43.18,0) 36(43.18,2.54)
  silkscreen extent -1.27,-1.27 44.45,3.81
J1-0603 [mm] "Chip Resistor, Body 1.6x0.8mm, IPC High Density"
  rect 0.7x0.9 smd: 1(-0.75,0) 2(0.75,0)
  silkscreen extent -0.2,-0.35 0.2,0.35, body extent -0.85,-0.48 0.85,0.48, height 0.9
KSTN-3568_V [mm] "THD, 4-Leads, Body 16x6.73mm, Pitch 9.9mm"
  rect 2.1x2.1 hole 1.6: 1(-4.95,1.7)
  round 2.1 hole 1.6: 2(-4.95,-1.7) 3(4.95,1.7) 4(4.95,-1.7)
  silkscreen extent -8,-3.36 8,4.09, body extent -8,-3.37 8,3.37, height 7.44
"LD1117S33TR - duplicate" [mm] "SOT223, LDO 3.3V Converter"
  rect 2.15x1 smd: 1(-2.925,2.3) 2(-2.925,0) 3(-2.925,-2.3)
  rect 2.15x3.25 smd: 4(2.925,0)
  silkscreen extent -3.05,-3.35 1.55,3.47, body extent -3.5,-3.35 3.5,3.35, height 1.8
SMB [mm] "DO-214-AA/SMB; 2 C-Bend Leads; Body 5.3 x 3.6 mm, inc. leads (LxW)"
  rect 2.3x2.3 smd: 1(-2.25,0) 2(2.25,0)
  silkscreen extent -3.8,-1.55 4.1,1.55
SOT95P240X120-3N [mm] "SOT23, 3-Leads, Body 2.90x2.40mm, Pitch 0.95mm, IPC Medium Density"
  rect 0.9x0.6 smd: 1(-1.2,0.95) 2(-1.2,-0.95) 3(1.2,0)
  silkscreen extent -0.76,-1.55 0.75,1.55, body extent -0.75,-1.55 0.75,1.55, height 1.2
SP1103C-01UTG [mm]
  rect 0.58x1 smd: 1(-0.85,0) 2(0.85,0)
  silkscreen extent -0.25,-0.51 0.25,0.51
"STM32F030R8 - duplicate" [mil]
  rect 47x12 smd: 1(-226.38,147.64) 2(-226.38,127.95) 3(-226.38,108.27) 4(-226.38,88.58) 5(-226.38,68.9) 6(-226.38,49.21) 7(-226.38,29.53) 8(-226.38,9.84) 9(-226.38,-9.84) 10(-226.38,-29.53) 11(-226.38,-49.21) 12(-226.38,-68.9) 13(-226.38,-88.58) 14(-226.38,-108.27) 15(-226.38,-127.95) 16(-226.38,-147.64) 33(226.38,-147.64) 34(226.38,-127.95) 35(226.38,-108.27) 36(226.38,-88.58) 37(226.38,-68.9) 38(226.38,-49.21) 39(226.38,-29.53) 40(226.38,-9.84) 41(226.38,9.84) 42(226.38,29.53) 43(226.38,49.21) 44(226.38,68.9) 45(226.38,88.58) 46(226.38,108.27) 47(226.38,127.95) 48(226.38,147.64)
  rect 12x47 smd: 17(-147.64,-226.38) 18(-127.95,-226.38) 19(-108.27,-226.38) 20(-88.58,-226.38) 21(-68.9,-226.38) 22(-49.21,-226.38) 23(-29.53,-226.38) 24(-9.84,-226.38) 25(9.84,-226.38) 26(29.53,-226.38) 27(49.21,-226.38) 28(68.9,-226.38) 29(88.58,-226.38) 30(108.27,-226.38) 31(127.95,-226.38) 32(147.64,-226.38) 49(147.64,226.38) 50(127.95,226.38) 51(108.27,226.38) 52(88.58,226.38) 53(68.9,226.38) 54(49.21,226.38) 55(29.53,226.38) 56(9.84,226.38) 57(-9.84,226.38) 58(-29.53,226.38) 59(-49.21,226.38) 60(-68.9,226.38) 61(-88.58,226.38) 62(-108.27,226.38) 63(-127.95,226.38) 64(-147.64,226.38)
  silkscreen extent -273,-270 270,270, body extent -236,-236 236,236, height 63
STPS2L30A [mm] "SODFL, Shottkey Diode"
  rect 2x1.65 smd: 1(-1.9,0) 2(1.9,0)
  silkscreen extent -3.07,-1.45 2.3,1.5, body extent -2.54,-1.45 2.54,1.45, height 2.45
TDK-C5750-2_M [mm] "SMD, 2-Leads, Body 6.1x5.4mm, IPC Low Density"
  rect 1.27x5.5 smd: 1(-2.644,0) 2(2.644,0)
  silkscreen extent -1.67,-2.65 1.67,2.65, body extent -3.05,-2.7 3.05,2.7, height 2.5
"Toshiba_11-11F1_0 - duplicate" [mm]
  rect 0.8x1.2 smd paste+0 mask+0.102: 1(-0.635,-3.15) 2(0.635,-3.15) 3(0.635,3.15) 4(-0.635,3.15)
  silkscreen extent -1.47,-2.4 1.47,2.4
TPH2900ENH [mm]
  rect 3x4.61 smd: 1(4.318,-1.905)
  rect 1.6x0.8 smd: 1(5.673,-1.27) 1(5.673,0) 1(5.673,-3.81) 1(5.673,-2.54) 2(0.127,-3.81) 3(0.127,0) 3(0.127,-1.27) 3(0.127,-2.54)
  silkscreen extent 0.33,-4.7 5.33,0.89
UCS2D151MHD1TN [mil] "Radial Cap 50% Protection"
  rect 60x60 hole 38: 1(-150,170)
  round 60 hole 38: 2(145,170)
  silkscreen extent -316,-145 313,485
UVY1V101MED1TD [mil] "Radial Cap from Nichicon"
  rect 60x60 hole 28: 1(-18.43,0)
  round 60 hole 28: 2(80,0)
  silkscreen extent -93,-124 155,124

## Part data
C1 C4 C5 C6 C22: "Polarized Capacitor (Axial)", LatestRevisionDate=17-Jul-2002, LatestRevisionNote="Re-released for DXP Platform.", PackageDescription="Polarized Capacitor; 2 Leads", PackageReference=POLAR0.8, Published=8-Jun-2000, Publisher="Altium Limited"
C2 C3 C7 C8 C9 C10 C11 C12 C13 C14 C15 C16 C17 C18 C19 C20 C21 C23 C24 C25 C26 C27 C28 C29 CU1_1_P1 CU1_1_P2 CU1_1_P3 CU1_2_P1 CU1_2_P2 CU1_2_P3 CU2_1_P1 CU2_1_P2 CU2_1_P3 CU2_2_P1 CU2_2_P2 CU2_2_P3: "Capacitor (Semiconductor SIM Model)", LatestRevisionDate=29-May-2009, LatestRevisionNote="IPC-7351 Footprint Added.", PackageDescription="Chip Capacitor", PackageReference=C1206, Published=8-Jun-2000, Publisher="Altium Limited"
CB_P1 CB_P2 CB_P3: "Capacitor (Semiconductor SIM Model) at least 10-20uF", LatestRevisionDate=29-May-2009, LatestRevisionNote="IPC-7351 Footprint Added.", PackageDescription="Chip Capacitor", PackageReference=C1206, Published=8-Jun-2000, Publisher="Altium Limited"
CN3: "Header, 6-Pin, Single row", LatestRevisionDate=17-Jul-2002, LatestRevisionNote="Re-released for DXP Platform.", Publisher="Altium Limited"
CQ2_P1 CQ2_P2 CQ2_P3: library part C5750X7R2E105K230KA, "Chip Capacitor, 1 uF, +/- 20%, 250 V, -55 to 125 degC, 2220 (5750 Metric), RoHS, Tape and Reel", Capacitance=10µF, Manufacturer=TDK, Operating Temperature=-55°C~125°C, Package / Case=2220(5750Metric), Package Description="SMD, 2-Leads, Body 6.1 x 5.4 mm", Package Reference=C5750-2, PCN Part Number=MLCCPartNumberChange30/Nov/2012, Ratings=-, Standard Package=1, Temperature Coefficient=X7S, Tolerance=±20%, Voltage - Rated=100V, Applications=GeneralPurpose, Catalog Drawings=CSERIES_2220_2.5, Category=Capacitors, Datasheet URL=https://datasheet.ciiva.com/24216/c5750x7s2a106m230kb-265716-24216594.pdf, Datasheet Version=09/2013, Family=CeramicCapacitors, Featured Product=Compact,High-CapacitanceMultilayerCeramicChipCapacitorsMidVoltageX7S-100VMLCCsC-SeriesMidVoltageMLCCs, Features=-, Height - Seated (Max)=-, Kits=445-9009-KIT-ND-KITCAPCERHICAP100V-630VSMDSAMPLEKIT1008-ND-KITCAPCERMLCC100V-630V, Lead Spacing=-, Lead Style=-, Manufacturer URL=http://www.tdk.com/, Mounting Technology=SurfaceMount, Mounting Type=SurfaceMount,MLCC, Online Catalog=CSeries,MidVoltage, Other Names=445-5212-1, Packaging=CutTape(CT), Product Training Modules=SEAT,CCV,andTVCLDesignToolsCSeriesMidVoltageCapacitorsFamilyGuidetoReplacinganElectrolyticCapacitorwithanMLCC, RoHS Information=RoHSCertificate-MLCC, Series=C, Size / Dimension="0.224\"Lx0.197\"W(5.70mmx5.00mm)", Thickness (Max)="0.098\"(2.50mm)"
D1 D20 D21: Manuf_1=STM, Manuf_Part_1=BAT60JFILM, Distrib=ST, ECCN_US/EU=EAR99/NEC, Order=BAT60JFILM, Provided=ST, Revision="July-2002: Re-released for DXP Platform."
D2 D3 D4 D5 D6 D7 D8 D9 D10 D11 D12 D13 D14 D15 D16 D17 D18 D19: "9V (Typ) Clamp 80A (8/20µs) Ipp Tvs Diode Surface Mount 2-DFN (1.6x1)", Manuf="Littelfuse Inc.", Package=0603/2-DFN, Distrib=Digi-Key, Manuf_Part_Num=SP1103C-01UTG, Order=F10154CT-ND, Purchase Link=https://www.digikey.com/product-detail/en/littelfuse-inc/SP1103C-01UTG/F10154CT-ND/7402659
DB_P1 DB_P2 DB_P3: library part "D Schottky", "Schottky Diode", Code_JEDEC=DO-214-AA, LatestRevisionDate=17-Jul-2002, LatestRevisionNote="Re-released for DXP Platform.", PackageDescription="DO-214-AA/SMB; 2 C-Bend Leads; Body 5.3 x 3.6 mm, inc. leads (LxW)", PackageReference=SMB, Published=8-Jun-2000, Publisher="Altium Limited"
F1_P1 F1_P2 F1_P3: library part CMP-2000-05464-1, "Fuse Holder, 20 A, 500 V, -50 to 145 degC, 4-Pin THD, RoHS", Manufacturer=Keystone, Package Description="4-Pin Through Hole Device, Body 16 x 6.73 mm, Pitch 9.9 mm", Datasheet URL=https://datasheet.ciiva.com/16294/m60-2p40-16294706.pdf, Datasheet Version=04/2013, Manufacturer URL=http://www.keyelco.com/, Mounting Technology=ThroughHole, Package Reference=3568
HALLA_ISO HALLB_ISO HALLC_ISO HB_TRIG_SEL: "Header, 3-Pin", LatestRevisionDate=17-Jul-2002, LatestRevisionNote="Re-released for DXP Platform.", Publisher="Altium Limited"
J1 J2: "Receptacle Assembly, 9 Position, Right Angle", PackageDocument=O, DatasheetDocument=1-Sep-1999, Gender=Receptacle, LatestRevisionDate=17-Jul-2002, LatestRevisionNote="Re-released for DXP Platform.", Orientation="Right Angle", PackageReference=788750, Positions=9, Published=15-Jun-2001, Publisher="Altium Limited"
L1: library part Res3, "Resistor", LatestRevisionDate=29-May-2009, LatestRevisionNote="IPC-7351 Footprint Added.", PackageDescription="Chip Resistor", PackageReference=J1-0603, Published=8-Jun-2000, Publisher="Altium Limited"
ON_SW_ISO PT_3V3 PT_5V3 PT_12V: "Header, 2-Pin", LatestRevisionDate=17-Jul-2002, LatestRevisionNote="Re-released for DXP Platform.", Publisher="Altium Limited"
P1: "Header, 18-Pin", LatestRevisionDate=17-Jul-2002, LatestRevisionNote="Re-released for DXP Platform.", Publisher="Altium Limited"
P2: "Header, 18-Pin, Dual row", LatestRevisionDate=17-Jul-2002, LatestRevisionNote="Re-released for DXP Platform.", Publisher="Altium Limited"
PT_P1 PT_P2 PT_P3: "Header, 2-Pin, Dual row", LatestRevisionDate=17-Jul-2002, LatestRevisionNote="Re-released for DXP Platform.", Publisher="Altium Limited"
Q1 Q2 Q3: "MOSFET N-CH 60V 0.25A SST3"
QH_P1 QH_P2 QH_P3 QL_P1 QL_P2 QL_P3: "N-Channel 200V 33A (Ta) 78W (Tc) Surface Mount 8-SOP Advance (5x5)", Manufacturer=Toshiba, Part Number=TPH2900ENHL1QCT-ND, ComponentLink1Description=TPH2900ENH, ComponentLink1URL=https://www.digikey.com/product-detail/en/toshiba-semiconductor-and-storage/TPH2900ENHL1Q/TPH2900ENHL1QCT-ND/5456291
R1 R2 R3 R4 R5 R6 R7 R8 R9 R10 R11 R12 R13 R14 R15 R16 R17 R18 R19 R20 R21 R22 R23 R24 R25 R26 RB_P1 RB_P2 RB_P3 RQH_P1 RQH_P2 RQH_P3 RQL_P1 RQL_P2 RQL_P3 RU1H_P1 RU1H_P2 RU1H_P3 RU1L_P1 RU1L_P2 RU1L_P3 RV1_P1 RV1_P2 RV1_P3 RV2_P1 RV2_P2 RV2_P3: "Resistor", LatestRevisionDate=29-May-2009, LatestRevisionNote="IPC-7351 Footprint Added.", PackageDescription="Chip Resistor", PackageReference=J1-0603, Published=8-Jun-2000, Publisher="Altium Limited"
U1_P1 U1_P2 U1_P3: "600 V / 4.5 A, High and Low / Side Automotive Gate / Driver IC", Manufacturer="On Semiconductor", ComponentLink1Description=Datasheet, ComponentLink1URL=https://www.onsemi.com/pub/Collateral/FAN7191_F085-D.PDF, Part Number=FAN7191-F085
U2_P1 U2_P2 U2_P3: library part CMP-0272-02013-3, "550 uA/Ch, 3 MHz, Rail-to-Rail Output Operational Amplifier, 2.7 to 16 V, -40 to 125 degC, 8-pin SOIC (D8), Green (RoHS & no Sb/Br)", Manufacturer="Texas Instruments", Rating=Catalog, Total Supply Voltage(Max)(+5V is 5, +/-5V is 10)=16, Total Supply Voltage(Min)(+5V is 5, +/-5V is 10)=2.7, CMRR(Min)(dB)=58, Code_JEDEC=MS-012, ComponentLink1Description="Manufacturer URL", ComponentLink1URL=http://www.ti.com/, ComponentLink2Description=Datasheet, ComponentLink2URL=http://www.ti.com/lit/ds/symlink/tlv272.pdf, ComponentLink3Description="Package Specification", ComponentLink3URL=http://www.ti.com/litv/pdf/msoi002j, DatasheetVersion=SLOS351D, Eco-Plan="Green (RoHS & no Sb/Br)", GBW(Typ)(MHz)=2.4, IIB(Max)(pA)=60, Iq per channel(Max)(mA)=0.56, Mounting Technology="Surface Mount", Number of Channels=2, Offset Drift(Typ)(uV/C)=2, PackageDescription="8-Pin Plastic Small Outline, Body 4.9 x 3.9 mm, Pitch 1.27 mm", PackageReference=D0008A, PackageVersion="4040047-3/M, 06/2011", Packing="LARGE T&R", PartNumber=TLV272IDR, Slew Rate(Typ)(V/us)=2.1, Sub Family="Low Supply Voltage Amplifier (<=2.7V), Precision Amplifier", Vio (25C)(Max)(mV)=5
U4 U5: "Buck Switching Regulator IC Positive Adjustable 0.8V 1 Output 3A SOT-23-6 Thin, TSOT-23-6", ComponentLink1Description=Digikey, ComponentLink1URL=https://www.digikey.com/product-detail/en/diodes-incorporated/AP63301WU-7/31-AP63301WU-7CT-ND/10492238
U6 U7 U8: "Optoisolator Transistor Output 3750Vrms 1 Channel 4-SO", Digikey Part Number=TLP291(BLL-TPSECT-ND, Datasheet=https://toshiba.semicon-storage.com/info/docget.jsp?did=14152&prodName=TLP291(SE, Digikey Order Link=https://www.digikey.com/product-detail/en/toshiba-semiconductor-and-storage/TLP291-BLL-TP-SE/TLP291-BLL-TPSECT-ND/4562947
L2 L3: Code_IEC=1005, Code_JEITA=0402, LatestRevisionDate=29-May-2009, LatestRevisionNote="IPC-7351 Footprint Added.", PackageDescription="Chip Inductor", PackageReference=0402-A, Published=8-Jun-2000, Publisher="Altium Limited"

## Via types
v1: diameter 24, hole 13, Top Layer to Bottom Layer, 125 vias
v2: diameter 50, hole 28, Top Layer to Bottom Layer, 15 vias
v3: diameter 24, hole 13, Top Layer to Bottom Layer, tented both sides, 12 vias
v4: diameter 360, hole 170, Top Layer to Bottom Layer, 7 vias
v5: diameter 200, hole 170, Top Layer to Bottom Layer, 3 vias
v6: diameter 50, hole 28, Top Layer to Bottom Layer, tented both sides, 1 vias

## Nets (pads, with @x,y where several pads share a name; then routed paths per layer and width w, separated by ;. In a path a pad name is that pad's centre, name@x,y a point inside that pad or via, vN(x,y) a via of type N, cw(c..) or ccw(c..) an arc to the next point about the centre after c; other vN are vias at no path point)
3V: C24.2 C26.2 C28.2 D21.2 J2.5 R16.2 R17.2 R18.2 R22.2 R23.2 R24.2 | length 2175.6
  Top Layer w20: D21.2@4125,1650.2 D21.2@4125,1645.47 ; R16.2@4450,1645 4450,1594.53 4485,1559.53 4610,1559.53 4650,1599.53 R23.2@4650,1645 ; R16.2@4450,1645.47 4449.02,1646.46 4375.98,1646.46 C24.2@4375,1647.44 4374.02,1646.46 4300.98,1646.46 R22.2@4300,1645.47 D21.2@4125,1645.47 ; J2.5@4581.89,1425 4381.89,1225 4250,1225 4125,1350 D21.2@4125,1645.47 ; R23.2@4650,1645.47 4650.98,1646.46 4724.02,1646.46 C26.2@4725,1647.44 4725.98,1646.46 4799.02,1646.46 R17.2@4800,1645.47 ; R17.2@4800,1645 4800,1594.53 4835,1559.53 4960,1559.53 5000,1599.53 R24.2@5000,1645 ; R24.2@5000,1645.47 5000.98,1646.46 5074.02,1646.46 C28.2@5075,1647.44 5075.98,1646.46 5149.02,1646.46 R18.2@5150,1645.47
3V3: C8.2 C13.2 C14.2 C15.2 C25.2 C27.2 C29.2 CN3.1 CU2_1_P1.1 CU2_1_P2.1 CU2_1_P3.1 CU2_2_P1.1 CU2_2_P2.1 CU2_2_P3.1 D21.1 L1.1 PT_3V3.1 R7.2 R8.2 R14.2 R15.2 R19.2 R20.2 R21.2 R25.2 R26.2 U2.1 U2.32 U2.64 U2_P1.8 U2_P2.8 U2_P3.8 U3.2 U3.4 | length 12534.1
  Top Layer w10: 3975,3000 4123.95,3000 4125,3001.05 U2.64@4223.62,3001.05 ; U2.64@4223.62,3002.36 4241.12,3002.36 U2.1@4302.36,2941.12 ; U2.1@4302.36,2923.62 U2.1@4302.36,2941.12 ; U2.32@4675.38,3296.64 U2.32@4675.69,3296.95 ; U2.32@4676.38,3296.95 U2.32@4675.69,3296.95 ; U2.32@4676.38,3297.64 U2.32@4675.69,3296.95 ; U2.1@4302.36,2941.12 4303.36,2942.12 4303.36,2963.36 4310,2970 4310.36,2970 4637.31,3296.95 U2.32@4675.69,3296.95
  Top Layer w20: U3.4@3959.84,4025 3975,4009.84 3975,3852.56 C15.2@3972.44,3850 C14.2@3972.44,3775 C13.2@3972.44,3700 3971.46,3699.02 3971.46,3428.54 PT_3V3.1@3975,3425 3972.74,3422.74 3972.74,3252.26 R25.2@3970.47,3250 R26.2@3970.47,3175 3975,3170.47 3975,3000 3975,2835 3920,2780 3920,2150 ; D21.1@4125,1799.8 3920,2004.8 3920,2150 ; U3.2@4190.16,4025 4192.42,4022.74 4272.74,4022.74 R7.2@4275,4020.47 ; L1.1@4660,2720.47 4685,2695.47 4685,2400 4499.41,2214.41 4499.41,2200 ; R14.2@4800,2154.53 R20.2@4725,2154.53 4724.02,2153.54 4650.98,2153.54 C27.2@4650,2152.56 4648.03,2152.56 4600.59,2200 4499.41,2200 ; R14.2@4803.94,2154.53 4849.41,2200 4950.59,2200 C29.2@4998.03,2152.56 ; C29.2@5000,2152.56 5000.98,2153.54 5074.02,2153.54 R21.2@5075,2154.53 R15.2@5150,2154.53 5195.47,2200 5285,2200 5580,2495 v1(5580,3200) 5580,3309 5580,4595 v1(5580,4600) v1(5580,5535) ; v1(5580,5615) 5890,5925 6350,5925 6400,5975 CU2_1_P3.1@6400,6100 CU2_2_P3.1@6400,6175 6472.2,6175 6475,6172.2 U2_P3.8@6475,6161.22 ; v1(5675,3200) 6350,3200 6400,3250 CU2_1_P1.1@6400,3300 CU2_2_P1.1@6400,3375 6472.2,3375 6475,3372.2 U2_P1.8@6475,3361.22 ; v1(5675,4600) 6350,4600 6400,4650 CU2_1_P2.1@6400,4700 CU2_2_P2.1@6400,4775 6472.2,4775 6475,4772.2 U2_P2.8@6475,4761.22 ; 3920,2150 3922.56,2152.56 C25.2@4300,2152.56 4300.98,2153.54 4374.02,2153.54 R19.2@4375,2154.53 R8.2@4450,2154.53 4453.94,2154.53 4499.41,2200
  Top Layer w40: U3.4@3959.84,4025 U3.2@4190.16,4025
  Bottom Layer w20: v1(5580,3200) v1(5675,3200) ; v1(5580,4600) v1(5675,4600) ; v1(5580,5535) v1(5580,5615)
5V: D20.2 J2.9 | length 1132.8
  Top Layer w20: D20.2@3975,1650.2 3975,1350 4200,1125 4448.23,1125 J2.9@4636.42,1313.19
5V3: C12.2 C19.2 C20.2 C21.2 C22.1 D20.1 L3.2 PT_5V3.1 R1.1 U3.3 | length 4243.6
  Top Layer w20: D20.1@3975,1800 3875,1900 3875,2800 3925,2850 3925,3475 3875,3525 3875,4150 PT_5V3.1@3975,4250 ; C22.1@4049.61,4508.43 4050.39,4508.43 4059.13,4508.43 C22.1@4066.57,4508.43 ; C19.2@4349.61,4515 C20.2@4436.02,4515 C21.2@4522.44,4515 4524.61,4515 4522.34,4512.74 4522.34,4442.26 R1.1@4520.08,4440
  Top Layer w40: PT_5V3.1@3975,4250 4175,4250 4175,4383.82 4050.39,4508.43 C22.1@4049.61,4509.21 ; L3.2@4052.56,4790 4052.56,4712.05 4249.61,4515 C19.2@4349.61,4515 ; C12.2@4172.44,4250 4172.44,4115.87 4172.76,4115.55 U3.3@4190.16,4115.55
  Top Layer w50: C22.1@4049.61,4509.21 L3.2@4049.61,4787.83 ; L3.2@4051.08,4788.52 L3.2@4052.56,4790